# Altium PCB MIET_464512_002_C2.PcbDoc
Units mm, origin at the board's own origin, x right, y up, seen from the top; angles counter-clockwise.
Board outline 138 x 64 mm, 2 copper layers (Top Layer, Bottom Layer), stack 1.535 mm thick; 44 components, 61 nets, 236 pads, 62 vias.
Unrouted connection lines stored in the file: 1.
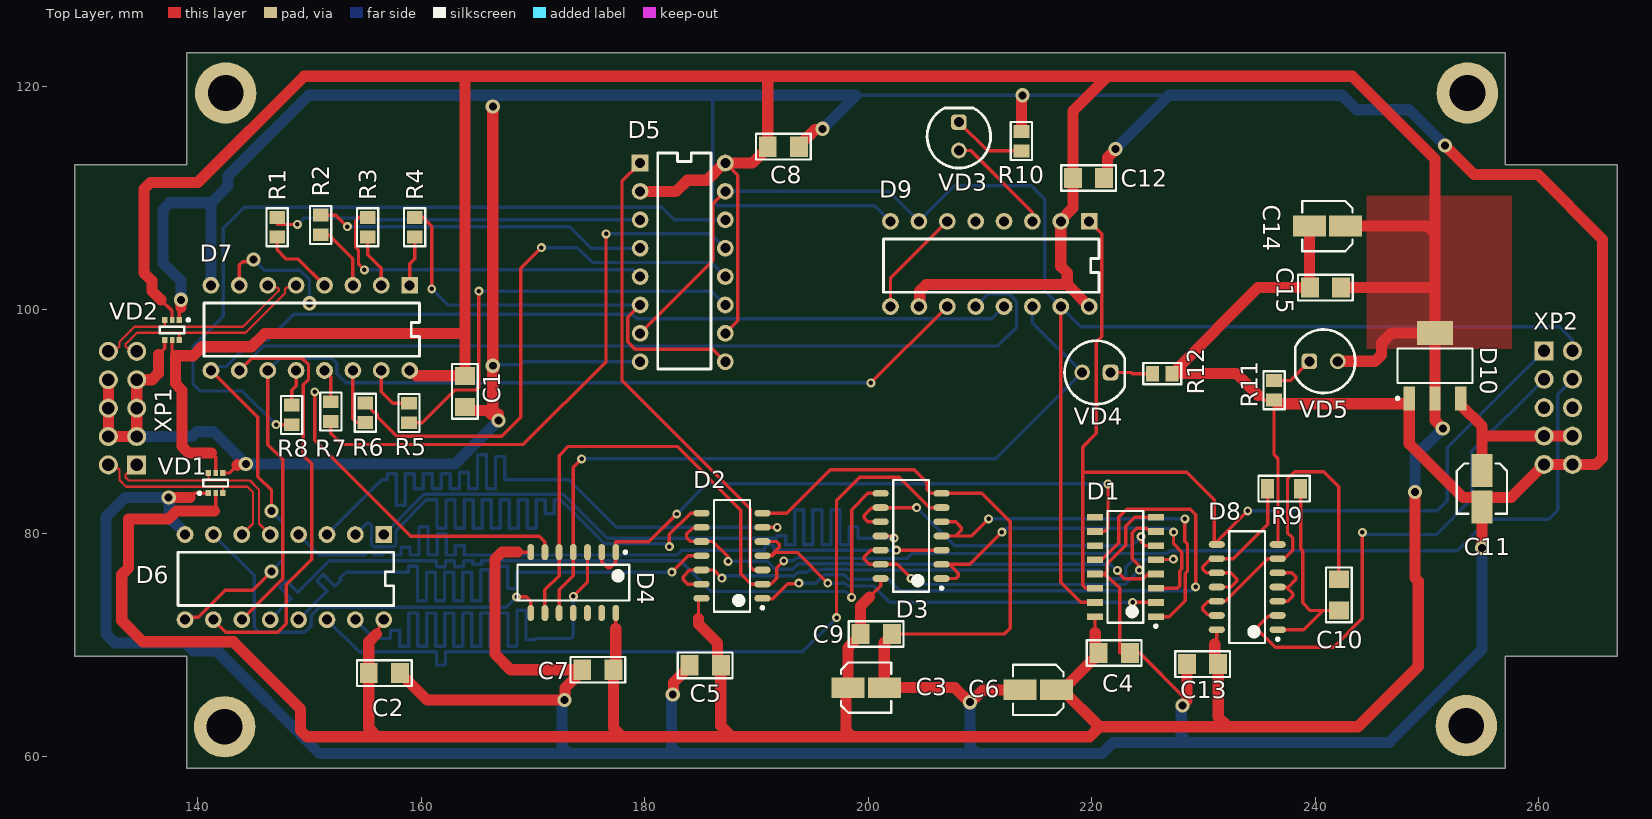
[diagram p0: Top Layer view]
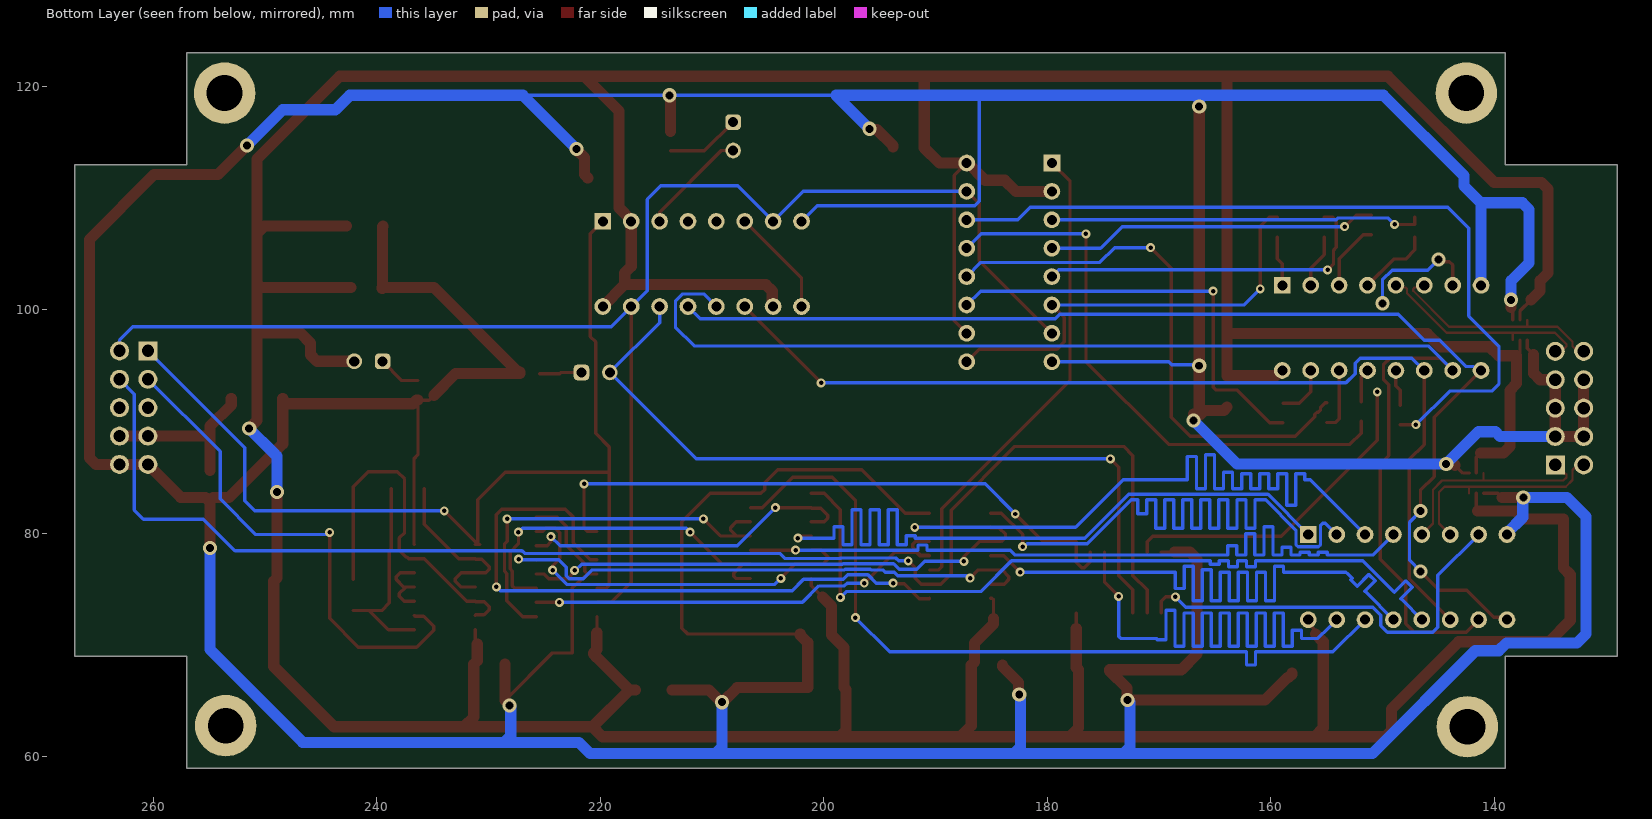
[diagram p1: Bottom Layer view, seen from below]
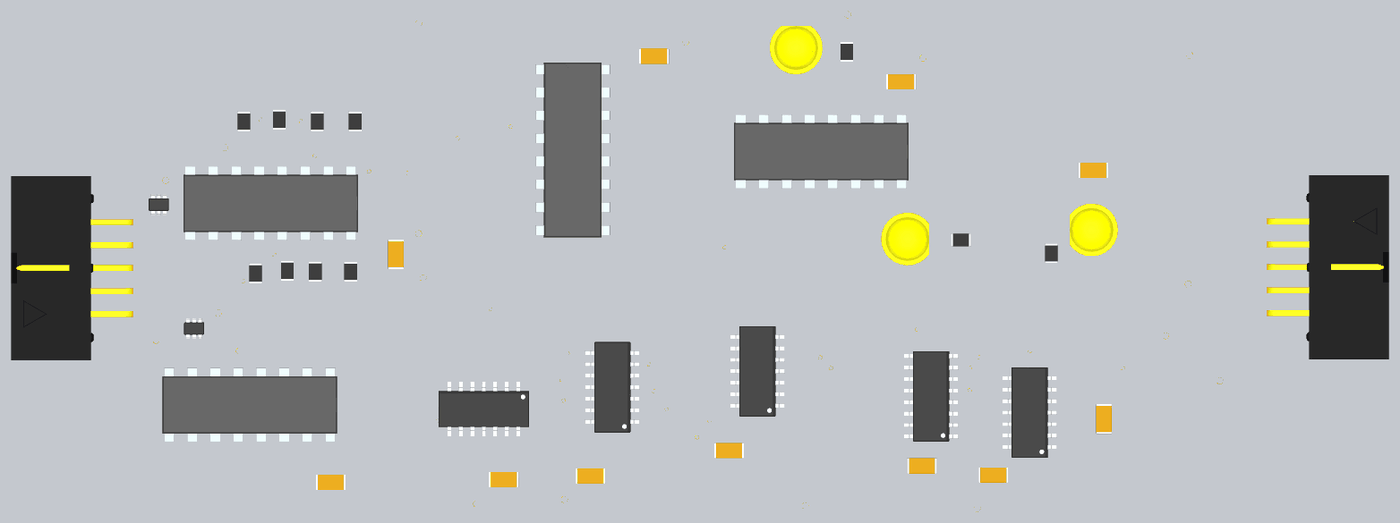
[diagram p2: 3D render of the assembled board from above, using the file's embedded part models]

## Layer stack, top to bottom
Top Solder: solder mask 0.0102, Solder Resist, Dk 3.5
Top Layer: signal copper 0.018
Dielectric 1: core 1.499, Core-043, Dk 4.3
Bottom Layer: signal copper 0.018
Bottom Solder: solder mask 0.0102, Solder Resist, Dk 3.5

## Board outline
139,59 139,69 129,69 129,113 139,113 139,123 257,123 257,113 267,113 267,69 257,69 257,59

## Design rules (kind name [scope] priority, off if disabled: settings)
Clearance [All] p1: gap=0.2 ignorepadtopadclearanceinfootprint=FALSE
DiffPairsRouting [All] p1: maxlimit=0.77 minlimit=0.2 mostfreqgap=0.35 toplayer_minwidth=0.2 toplayer_maxwidth=0.5 toplayer_prefwidth=0.38 bottomlayer_minwidth=0.2 bottomlayer_maxwidth=0.5 bottomlayer_prefwidth=0.38 maxuncoupledlength=12.7
HoleSize [All] p1: absolutevalues=TRUE maxlimit=4.5 minlimit=0.4 maxpercent=80.000 minpercent=20.000
HoleToHoleClearance [All] p1: gap=0.8 allowstackedmicrovias=TRUE
MatchedLengths [InNetClass('ABC[0..7]')] p1: tolerance=1 checknetsindiffpair=FALSE checkdiffpairvsdiffpair=TRUE checkxsignals=TRUE checkothers=TRUE
PolygonConnect [All] p1: connectstyle=Relief reliefconductorwidth=0.254 reliefentries=4 polygonreliefangle="90 Angle" airgapwidth=0.254
RoutingVias [All] p1: holewidth=0.4 width=0.8 viastyle="Through Hole" minholewidth=0.3 minwidth=0.6 maxholewidth=1 maxwidth=1.5
SolderMaskExpansion [All] p1: expansion=0.102 istentingtop=FALSE
Width [All] p1: maxlimit=1 minlimit=0.2 preferedwidth=0.3
27 further rules are at their usual default settings.

## Classes and differential pairs
net class S[0..2]: S0 S1 S2
net class IND[0..7]: IND0 IND1 IND2 IND3 IND4 IND5 IND6 IND7
net class ABC[0..7]: ABC0 ABC1 ABC2 ABC3 ABC4 ABC5 ABC6 ABC7
component class MIET_464512_002_SH2: C10 C11 C12 C13 C14 C15 D8 D9 D10 gg R9 R10 R11 R12 VD3 VD4 VD5
component class MIET_464512_002_C2_SH1: C1 C2 C3 C4 C5 C6 C7 C8 C9 D1 D2 D3 D4 D5 D6 D7 R1 R2 R3 R4 R5 R6 R7 R8 VD1 VD2 XP1
differential pair Out2: +Out2_P -Out2_N
differential pair Out1: +Out1_P -Out1_N

## Components (designator, comment, footprint, x,y, rotation, side; value= is the part's Value field where it differs from the comment)
C1 "1206" K10-79_3.2_1.6(1206) 163.9,92.7 r90 top value="1200 п"
C2 "1206" K10-79_3.2_1.6(1206) 156.7,67.5 r180 top value="1200 п"
C3 "CA010M0010REB-0405" CAPAE4443X63M 199.8,66.2 r0 top
C4 "1206" K10-79_3.2_1.6(1206) 222,69.3 r180 top value="0,1 мк"
C5 "1206" K10-79_3.2_1.6(1206) 185.4,68.2 r0 top value="0,1 мк"
C6 "CA010M0010REB-0405" CAPAE4443X63M 215.2,66 r180 top
C7 "1206" K10-79_3.2_1.6(1206) 175.8,67.8 r180 top value="0,1 мк"
C8 "1206" K10-79_3.2_1.6(1206) 192.4,114.6 r0 top value="0,1 мк"
C9 "1206" K10-79_3.2_1.6(1206) 200.7,71 r0 top value="0,1 мк"
C10 "1206" K10-79_3.2_1.6(1206) 242.1,74.5 r90 top value="1200 п"
C11 "CA010M0010REB-0405" CAPAE4443X63M 254.9,84 r270 top
C12 "1206" K10-79_3.2_1.6(1206) 219.7,111.8 r180 top value="0,1 мк"
C13 "1206" K10-79_3.2_1.6(1206) 229.9,68.3 r0 top value="0,1 мк"
C14 "CA010M0010REB-0405" CAPAE4443X63M 241.075,107.5 r180 top
C15 "1206" K10-79_3.2_1.6(1206) 240.9,102 r0 top value="0,1 мк"
D1 "SOIC-16" SO16-N 223,77 r180 top
D2 "74AC00SC" SO14-N 187.8,78 r180 top
D3 "74AC00SC" SO14-N 203.825,79.77 r180 top
D4 "74AC00SC" SO14-N 173.6,75.6 r270 top
D5 "MC14520BCP \"Motorola\"" DIP16 179.58,113.14 r0 top
D6 "DIP-16" DIP16 156.64,79.9 r270 top
D7 "DIP-16" DIP16 158.96,102.2 r270 top
D8 "74AC00SC" SO14-N 233.9,75.2 r180 top
D9 "MC14520BCP \"Motorola\"" DIP16 219.76,107.92 r270 top
D10 "LM1117IMP-5.0" SOT-223 250.7,95 r90 top
R1 "0805" RES_0805_2012_N 147.1,107.4 r270 top value=270
R2 "0805" RES_0805_2012_N 151,107.6 r270 top value=270
R3 "0805" RES_0805_2012_N 155.2,107.4 r270 top value=270
R4 "0805" RES_0805_2012_N 159.4,107.4 r270 top value=270
R5 "0805" RES_0805_2012_N 158.9,90.775 r90 top value=270
R6 "0805" RES_0805_2012_N 155,90.8 r270 top value=270
R7 "0805" RES_0805_2012_N 151.9,90.9 r90 top value=270
R8 "0805" RES_0805_2012_N 148.4,90.6 r90 top value=270
R9 "Р1-12-0,25 100 Ом 5%-M-\"A\" АЛЯР.434110.005 ТУ" RES_1206_3216_N 237.2,84 r180 top value=100
R10 "0805" RES_0805_2012_N 213.7,115.1 r270 top value=270
R11 "0805" RES_0805_2012_N 236.3,92.8 r90 top value=270
R12 "0805" RES_0805_2012_N 226.3,94.3 r180 top value=270
VD1 "SOT-363" SOT363_NXP 141.6,84.5 r90 top
VD2 "SOT-363" SOT363_NXP 137.7,98.2 r270 top
VD3 "521-9466" 521-9466 208.1,115.53 r90 top
VD4 "521-9466" 521-9466 220.4,94.4 r0 top
VD5 "521-9466" 521-9466 240.73,95.4 r180 top
XP1 "TE_1-1634689-0" BH-10R 133.27,91.21 r0 top
XP2 "TE_1-1634689-0" BH-10R 261.73,91.25 r180 top

## Footprints (in the part's own frame and the unit in brackets; to place one, negate y for a bottom-side part, rotate by r counter-clockwise, add the part's x,y. Pads: shape width x height; smd on the part's side, far side on the other; paste and mask are expansions set on the pad)
521-9466 [mm]
  round 1.4 hole 0.9: A(-1.27,0)
  rrect50% 1.4x1.4 hole 0.9: C(1.27,0)
  silkscreen extent -2.84,-2.84 2.54,2.84, body extent -2.92,-2.92 2.41,2.92, height 9.51
BH-10R [mm] "Разъем угловой 2х5х2,54 типа ВН"
  rect 1.7x1.7 hole 1.1: 1(1.27,-5.08)
  round 1.7 hole 1.1: 2(-1.27,-5.08) 3(1.27,-2.54) 4(-1.27,-2.54) 5(1.27,0) 6(-1.27,0) 7(1.27,2.54) 8(-1.27,2.54) 9(1.27,5.08) 10(-1.27,5.08)
  body extent -11.85,-10.2 1.65,10.15, height 9.13
CAPAE4443X63M [mm] "Aluminum Electrolytic Capacitor, Body 4,30x4,30x6,30mm, IPC Low Density"
  rect 2.95x1.85 smd: 1(-1.625,0) 2(1.625,0)
  silkscreen extent -2.25,-2.25 2.25,2.25, body extent -2.9,-2.9 2.9,2.9, height 6.3
DIP16 [mm]
  rect 1.5x1.5 hole 0.9: 1(0,0)
  round 1.5 hole 0.9: 2(0,-2.54) 3(0,-5.08) 4(0,-7.62) 5(0,-10.16) 6(0,-12.7) 7(0,-15.24) 8(0,-17.78) 9(7.62,-17.78) 10(7.62,-15.24) 11(7.62,-12.7) 12(7.62,-10.16) 13(7.62,-7.62) 14(7.62,-5.08) 15(7.62,-2.54) 16(7.62,0)
  silkscreen extent 1.58,-18.42 6.35,0.89, body extent -0.25,-18.54 7.95,0.76, height 5.08
K10-79_3.2_1.6(1206) [mm]
  rect 1.6x1.8 smd: 1(-1.4,0) 2(1.4,0)
  silkscreen extent -2.45,-1.15 2.45,1.15, body extent -1.65,-0.85 1.65,0.85, height 1.6
RES_0805_2012_N [mm] "Rezistor 0805"
  rect 1.15x1.4 smd: 1(-0.875,0) 2(0.875,0)
  silkscreen extent -1.7,-0.95 1.7,0.95, body extent -1.1,-0.7 1.1,0.7, height 0.6
RES_1206_3216_N [mm] "Chip Resistor, 2-Leads, Body 3,20x1,60mm, IPC Medium Density"
  rect 1.15x1.75 smd: 1(-1.475,0) 2(1.475,0)
  silkscreen extent -2.3,-1.15 2.3,1.15, body extent -1.7,-0.87 1.7,0.87, height 0.8
SO14-N [mm]
  oval 1.45x0.6 smd: 1(-2.725,3.81) 2(-2.725,2.54) 3(-2.725,1.27) 4(-2.725,0) 5(-2.725,-1.27) 6(-2.725,-2.54) 7(-2.725,-3.81) 8(2.725,-3.81) 9(2.725,-2.54) 10(2.725,-1.27) 11(2.725,0) 12(2.725,1.27) 13(2.725,2.54) 14(2.725,3.81)
  silkscreen extent -2.85,-5 1.6,5, body extent -3,-5 3,5, height 1.45
SO16-N [mm] "SOIC, 16-Leads, Body 9,90x3,90mm, Pitch 1,27mm, IPC Medium Density"
  rect 1.45x0.6 smd: 1(-2.725,4.445) 2(-2.725,3.175) 3(-2.725,1.905) 4(-2.725,0.635) 5(-2.725,-0.635) 6(-2.725,-1.905) 7(-2.725,-3.175) 8(-2.725,-4.445) 9(2.725,-4.445) 10(2.725,-3.175) 11(2.725,-1.905) 12(2.725,-0.635) 13(2.725,0.635) 14(2.725,1.905) 15(2.725,3.175) 16(2.725,4.445)
  silkscreen extent -2.85,-5 1.6,5.42, body extent -3,-5 3,5, height 1.45
SOT363_NXP [mm]
  rect 0.55x0.5 smd: 1(-0.9,0.65) 3(-0.9,-0.65) 4(0.9,-0.65) 6(0.9,0.65)
  rect 0.55x0.4 smd: 2(-0.9,0) 5(0.9,0)
  silkscreen extent -1.02,-1.1 0.3,1.57, body extent -1.15,-1.1 1.15,1.1, height 1.1
SOT-223 [mm] "SOT223, 4-Leads, Body 6,50x7,00mm (avg), Pitch 2,30mm, IPC Medium Density"
  rect 2.15x1 smd: 1(-2.925,2.3) 2(-2.925,0) 3(-2.925,-2.3)
  rect 2.15x3.25 smd: 4(2.925,0)
  silkscreen extent -3.05,-3.35 1.55,3.47, body extent -1.85,-3.35 1.85,3.35, height 1.8

## Part data
C1 C2 C10: library part К10-79_1206_МП0, "Чип конденсатор 1206 МП0 ряд Е24", Manufacturer="ООО \"Кулон\"", Tolerance=±5%, Value_KD="1200 пФ", Voltage=50, BOM="Конденсатор К10-79-50-B-1200 пФ±5%-МП0 АЖЯР.673511.004 ТУ", Datum=19_12_2018, HelpURL=\\papa\Info\Altium_Library\Даташиты_и_ТУ\Конденсаторы_отечественные\К10-79_АЖЯР_673511_004ТУ.pdf, Hight=1.6, LibraryEngeneer=Желобаев, LiveStatus=производится, Name="Конденсатор К10-79", Packing=катушка, Permit MPSU=разрешен, Reliability=0.000005, Size=1206, TKE=МП0, TU="АЖЯР.673511.004 ТУ", Type=K10-79, Version=00, Weight=0.15
C3 C6 C11 C14: "Конденсатор алюминиевый электролитический"
C4 C5 C7 C8 C9 C12 C13 C15: library part К10-79_1206_Н90, "Чип конденсатор 1206 Н90 ряд Е6", Manufacturer="ООО \"Кулон\"", Tolerance=+80%-20%, Value_KD="0,1 мкФ", Voltage=50, BOM="Конденсатор К10-79-50-B-0,1 мкФ+80%-20%-Н90 АЖЯР.673511.004 ТУ", Datum=19_12_2018, HelpURL=\\papa\Info\Altium_Library\Даташиты_и_ТУ\Конденсаторы_отечественные\К10-79_АЖЯР_673511_004ТУ.pdf, Hight=1.6, LibraryEngeneer=Желобаев, LiveStatus=производится, Name="Конденсатор К10-79", Packing=катушка, Permit MPSU=разрешен, Reliability=0.000005, Size=1206, TKE=Н90, TU="АЖЯР.673511.004 ТУ", Type=K10-79, Version=00, Weight=0.15
D1: library part HCF4017BM1, "Декадный счетчик c 10 декодированными выходами", Manufacturer=STMicroelectronics, Power_Voltage="-0.5 -22 V", BOM="HCF4017BM1 \"STMicroelectronics\"", Case=SOIC-16, Created_by=Желобаев, Issue_date=05.04.2019, Name=HCF4017BM1, Name2="Микросхема HCF4017BM1", Version=0
D2 D3 D4 D8: "4 элемента 2И-НЕ TTL SOIC-14", Case=SOIC-14, Manufacturer="ON Semiconductor", Power_Voltage="4.5 - 5.5 V", BOM="74AC00SC \"ON Semiconductor\"", Created_by=Желобаев, Issue_date=10.04.2019, Name=74AC00SC, Name2="Микросхема 74AC00SC", Version=0
D5 D9: library part MC14520BCP, "Два двоичных счетчика", Case=DIP-16, Manufacturer=Motorola, BOM="MC14520BCP \"Motorola\"", Created_by=Желобаев, Issue_date=6.01.2019, Name=MC14520BCP, Name2="Микросхема MC14520BCP", Version=0
D6 D7: library part 74HC151N, "мультиплексор 8 канальный CMOS", Manufacturer="NXP Semiconductors", Power_Voltage="2.0 -6.0 V", BOM="74HC151N \"NXP Semiconductors\"", Case=DIP-16, Created_by=Желобаев, Issue_date=05.04.2019, Name=74HC151N, Name2="Микросхема 74HC151N", Version=0
R1 R2 R3 R4 R5 R6 R7 R8 R10 R11 R12: library part Р1-12-0,125-5%, "Резистор от 0,75 Ом до 2 МОм", Manufacturer="ОАО \"НПО \"Эркон\"", Tolerance=5%, Value_KD="270 Ом", Voltage=150, BOM="Р1-12-0,125 270 Ом 5%-M-\"A\" АЛЯР.434110.005 ТУ", Case=0805, Created_by=Желобаев, Issue_date=05_12_2018, Name=Р1-12-0,125, Name2="Резистор Р1-12-0,125", Size=0805, TKR=M, TU="АЛЯР.434110.005 ТУ", Type="Р1-12-0,125±5%-М-\"А\"", Version=00, Weight=0,01
R9: library part Р1-12-0,25-5%, "Резистор от 0,75 Ом до 2,2 МОм", Case=1206, Manufacturer="ОАО \"НПО \"Эркон\"", Tolerance=5%, Value_KD="100 Ом", Voltage=150, BOM="Р1-12-0,25 100 Ом 5%-M-\"A\" АЛЯР.434110.005 ТУ", Created_by=Желобаев, Issue_date=10.04.2019, Name=Р1-12-0,25, Name2="Резистор Р1-12-0,25", Size=1206, TKR=M, TU="АЛЯР.434110.005 ТУ", Type="Р1-12-0,25±5%-М-\"А\"", Version=00, Weight=0,015
VD1 VD2: library part BAV99S, "Высокоскоростные, переключающие диоды", Manufacturer=Nexperia, Voltage=100, BOM="BAV99S \"Nexperia\"", Case=SOT-363, Created_by=Желобаев, Issue_date=07.01.2019, Name=BAV99S, Name2="Диод BAV99S", Version=0
VD3 VD4 VD5: "Светодиод желтый 5 мм", Manufacturer="\"Dialight\"", BOM=#NAME?
XP1 XP2: "Вилка типа BH-10R угловая правая двухрядная 2х5х2.54", Case=BH-10R, Manufacturer="TE Connectivity", BOM="TE_1-1634689-0 \"TE Connectivity\"", Created_by=Желобаев, Issue_date=13.05.2019, Name=TE_1-1634689-0, Name2="Вилка угловая TE_1-1634689-0", Version=0

## Free pads (board coordinates)
  round 5.5 hole 3.2: M6(253.5,62.8) M7(253.6,119.4) M8(142.4,62.7) M9(142.5,119.4)

## Via types
v1: diameter 0.8, hole 0.4, Top Layer to Bottom Layer, 41 vias
v2: diameter 1.27, hole 0.711, Top Layer to Bottom Layer, 21 vias

## Nets (pads, with @x,y where several pads share a name; then routed paths per layer and width w, separated by ;. In a path a pad name is that pad's centre, name@x,y a point inside that pad or via, vN(x,y) a via of type N, cw(c..) or ccw(c..) an arc to the next point about the centre after c; other vN are vias at no path point)
+5: 
+5V: C1.2 C2.2 C3.1 C4.2 C5.2 C6.1 C7.1 C8.1 C9.1 C12.2 C13.2 C14.1 C15.2 D1.16 D2.14 D3.14 D4.14 D5.2 D5.10 D5.16 D6.16 D7.16 D8.14 D9.2 D9.10 D9.16 D10.2 D10.4 VD1.2 VD1.5 VD2.2 VD2.5 VD5.A | length 574.7
  Top Layer w0.3: 136.7,100.9 137.7,99.9 VD2.2 ; VD2.5 137.7,96.2 138,95.9 ; 141.2,87.2 141.6,86.8 VD1.5 ; 141.5,82 141.6,82.1 VD1.2 ; 156,71 156,71.315 156.64,71.955 D6.16 ; 177.4,71.5 177.41,71.51 D4.14 ; 184.8,72.4 184.8,74.051 184.939,74.19 D2.14 ; D5.10 188.316,99.016 188.316,112.024 D5.16 ; 200.1,74.3 201.1,75.3 D3.14 ; 220.275,71.125 D1.16 ; 231,70.1 231.175,70.275 D8.14
  Top Layer w1: 136.7,100.9 135.9,101.7 135.9,102.6 135.2,103.3 135.2,110.814 135.786,111.4 140,111.4 149.5,120.9 164.2,120.9 ; 141.2,87.2 139.186,87.2 138.6,87.786 138.6,92.8 138,93.4 138,95.9 139.6,95.9 140.4,96.7 144.8,96.7 146,97.9 163.9,97.9 ; 141.5,82 138.088,82 137.388,81.3 133.8,81.3 133.8,76.9 133.2,76.3 133.2,72.201 135.101,70.3 143.2,70.3 149.2,64.3 149.2,62.386 149.786,61.8 156.086,61.8 ; 156,71 155.3,70.3 C2.2 155.3,62.586 156.086,61.8 ; D7.16 159.095,94.58 159.575,94.1 C1.2 163.9,97.9 ; 177.4,71.5 177.4,68 C7.1 177.2,62.586 177.986,61.8 ; D5.2 182.8,110.6 183.8,111.6 185.558,111.6 187.098,113.14 D5.16 189.64,113.14 191,114.5 191,120.9 ; 184.8,72.4 184.8,71.9 186.5,70.2 186.5,68.5 C5.2 186.8,62.786 187.786,61.8 ; 200.1,74.3 199.3,73.5 C9.1 199.3,70.9 198.175,69.775 C3.1 198,66.025 198,62.386 198.586,61.8 ; D9.10 204.6,100.38 204.6,101.674 205.186,102.26 217.8,102.26 ; C6.1 C6.1@217.375,66 ; D9.16 217.8,102.26 ; 220.275,71.125 220.3,71.1 220.3,69.6 C4.2 220.6,69.2 220.3,68.9 220.275,68.9 C6.1@217.375,66 ; 231,70.1 231,68.6 C13.2 231.3,63.586 232.186,62.7 ; VD5.A 245.314,95.4 245.9,95.986 245.9,97.014 246.811,97.925 D10.4 ; C15.2 250.33,102 250.7,102.37 ; C14.1 250.014,107.5 250.7,106.814 ; v2(248.9,83.7) 248.9,76.013 249.2,75.713 249.2,68.1 243.8,62.7 232.186,62.7 ; v2(251.4,89.4) 250.7,90.1 D10.2 D10.4 ; 156.086,61.8 177.986,61.8 ; 163.9,97.9 163.9,120.6 164.2,120.9 ; 164.2,120.9 191,120.9 ; 177.986,61.8 187.786,61.8 ; 187.786,61.8 198.586,61.8 ; 191,120.9 221.4,120.9 ; 198.586,61.8 219.775,61.8 220.675,62.7 ; C6.1@217.375,66 220.675,62.7 ; 217.8,102.26 217.8,103.3 217.22,103.88 D9.2 217.22,108.055 218.3,109.135 C12.2 218.3,117.8 221.4,120.9 ; 220.675,62.7 232.186,62.7 ; 221.4,120.9 243.3,120.9 250.7,113.5 250.7,106.814 ; D10.4 250.7,102.37 ; 250.7,102.37 250.7,106.814
  Bottom Layer w1: v2(248.9,83.7) 248.9,86.9 249.2,87.2 v2(251.4,89.4)
ABC0: D3.3 D6.4 | length 72.3
  Top Layer w0.3: v1(202.514,78.5) D3.3
  Bottom Layer w0.3: D6.4 150.855,78.065 151.1,78.065 154.8,78.065 154.95,78.065 154.95,78.3 155.758,78.3 155.758,78.065 156.566,78.065 156.566,78.3 157.374,78.3 157.374,78.065 158.182,78.065 158.182,78.771 158.99,78.771 158.99,78.065 159.798,78.065 159.798,80.605 160.606,80.605 160.606,78.065 161.414,78.065 161.414,79.96 162.222,79.96 162.222,78.065 163.03,78.065 163.03,78.894 163.838,78.894 163.838,78.065 165.6,78.065 179.6,78.065 182.877,78.065 183.312,78.5 190.6,78.5 190.75,78.5 190.75,78.96 191.558,78.96 191.558,78.5 199.8,78.5 v1(202.514,78.5)
ABC1: D2.6 D6.3 | length 72.3
  Top Layer w0.3: D2.6 v1(191.846,80.54)
  Bottom Layer w0.3: D6.3 156.46,84.8 156.8,84.8 156.95,84.8 156.95,85.35 157.758,85.35 157.758,82.533 158.566,82.533 158.566,85.35 159.374,85.35 159.374,83.997 160.182,83.997 160.182,85.35 160.99,85.35 160.99,84 161.798,84 161.798,85.35 162.606,85.35 162.606,84 163.414,84 163.414,85.458 164.222,85.458 164.222,84 165.03,84 165.03,87.028 165.838,87.028 165.838,84 166.646,84 166.646,86.881 167.454,86.881 167.454,84.8 170.5,84.8 173.2,84.8 177.46,80.54 v1(191.846,80.54)
ABC2: D2.8 D6.2 | length 72.3
  Top Layer w0.3: v1(182.194,78.816) 182.194,79.905 184.099,81.81 D2.8
  Bottom Layer w0.3: D6.2 155.1,80.9 155.364,80.9 155.54,80.724 155.54,79.005 155.745,78.8 157.535,78.8 157.74,79.005 157.74,80.293 160.447,83 161.405,83 161.405,80.46 162.213,80.46 162.213,83 163.021,83 163.021,80.46 163.829,80.46 163.829,83 164.637,83 164.637,80.46 165.445,80.46 165.445,83 166.253,83 166.253,80.46 167.061,80.46 167.061,83 167.869,83 167.869,80.46 168.677,80.46 168.677,83 169.485,83 169.485,80.46 170.293,80.46 170.293,83 171.101,83 171.101,81.773 171.909,81.773 171.909,83 172.493,83 176.415,79.078 181.797,79.078 182.059,78.816 v1(182.194,78.816)
ABC3: D3.11 D6.1 | length 72.4
  Top Layer w0.3: D3.11 202.119,79.77 v1(202.311,79.578)
  Bottom Layer w0.3: D6.1 160.24,83.5 172.7,83.5 176.622,79.578 191.658,79.578 191.808,79.578 191.808,79.79 192.616,79.79 192.616,79 193.424,79 193.424,82.118 194.232,82.118 194.232,79 195.04,79 195.04,82.118 195.848,82.118 195.848,79 196.656,79 196.656,82.118 197.464,82.118 197.464,79 198.272,79 198.272,80.584 199.08,80.584 199.08,79.578 199.3,79.578 v1(202.311,79.578)
ABC4: D4.3 D6.15 | length 72.3
  Top Layer w0.3: v1(173.609,74.371) 174.87,75.632 D4.3
  Bottom Layer w0.3: D6.15 154.807,71.573 155.78,70.6 157.1,70.6 157.25,70.6 157.25,71.334 158.058,71.334 158.058,69.9 158.866,69.9 158.866,72.88 159.674,72.88 159.674,69.9 160.482,69.9 160.482,72.88 161.29,72.88 161.29,69.9 162.098,69.9 162.098,72.88 162.906,72.88 162.906,69.9 163.714,69.9 163.714,72.88 164.522,72.88 164.522,69.9 165.33,69.9 165.33,72.88 166.138,72.88 166.138,69.9 166.946,69.9 166.946,72.88 167.754,72.88 167.754,69.9 168.562,69.9 168.562,73.14 169.37,73.14 169.37,70.492 170.178,70.492 170.178,70.6 170.8,70.6 173.433,70.6 173.609,70.776 v1(173.609,74.371)
ABC5: D3.6 D6.14 | length 72.3
  Top Layer w0.3: v1(197.155,72.466) 197.155,82.956 199.238,85.039 202.757,85.039 205.486,82.31 D3.6
  Bottom Layer w0.3: D6.14 154.44,69.4 160.4,69.4 161.358,69.4 161.358,68.231 162.166,68.231 162.166,69.4 164.8,69.4 194.089,69.4 v1(197.155,72.466)
ABC6: D2.11 D6.13 | length 72.3
  Top Layer w0.3: v1(182.426,76.53) 183.896,78 D2.11
  Bottom Layer w0.3: D6.13 151.47,74.73 151.576,74.836 150.66,75.753 151.231,76.324 152.268,75.287 152.839,75.858 152.719,75.979 153.158,76.418 153.27,76.53 158.7,76.53 158.85,76.53 158.85,77.065 159.658,77.065 159.658,73.99 160.466,73.99 160.466,76.537 161.274,76.537 161.274,73.99 162.082,73.99 162.082,76.53 162.89,76.53 162.89,73.99 163.698,73.99 163.698,76.53 164.506,76.53 164.506,73.99 165.314,73.99 165.314,76.754 166.122,76.754 166.122,73.99 166.93,73.99 166.93,77.065 167.738,77.065 167.738,75.07 168.546,75.07 168.546,76.53 169.5,76.53 v1(182.426,76.53)
ABC7: D3.8 D6.12 | length 72.3
  Top Layer w0.3: v1(198.501,74.27) 198.501,82.132 199.949,83.58 D3.8
  Bottom Layer w0.3: D6.12 148.25,74.05 148.356,74.156 147.338,75.174 147.909,75.746 148.927,74.727 150.2,76 151.765,77.565 160.4,77.565 160.55,77.565 161.358,77.565 161.358,77.03 162.166,77.03 162.166,77.565 162.974,77.565 162.974,77.03 163.782,77.03 163.782,77.565 164.59,77.565 164.59,77.254 165.398,77.254 165.398,77.565 166.3,77.565 183.192,77.565 185.956,74.8 197.971,74.8 v1(198.501,74.27)
GND: C1.1 C2.1 C3.2 C4.1 C5.1 C6.2 C7.2 C8.2 C9.2 C11.2 C12.1 C13.1 C14.2 C15.1 D1.8 D1.13 D2.7 D3.7 D4.7 D5.8 D6.8 D7.8 D8.7 D9.8 D10.1 R10.1 R11.1 R12.1 VD1.1 VD1.4 VD2.1 VD2.4 XP1.3 XP1.4 XP1.5 XP1.6 XP1.7 XP1.8 XP2.9 XP2.10 | length 727.1
  Top Layer w0.3: 136.5,96 137.05,96.55 VD2.4 ; VD2.1 138.35,100.05 138.5,100.2 ; 139.3,83.2 139.7,83.6 VD1.1 ; VD1.4 142.8,85.4 143.5,86.1 ; 168.6,78.325 D4.7 ; D2.7 192.684,81.81 196.574,85.7 204.114,85.7 205.283,84.531 205.283,83.922 205.624,83.58 D3.7 210.16,83.58 212.7,81.04 212.7,71.526 212.173,71 C9.2 ; D1.13 221.12,76.365 ; D1.8 223.818,81.445 223.023,80.65 223.023,78.928 221.361,77.266 221.361,76.606 221.12,76.365 ; v2@228.5,65.073 224.273,69.3 C4.1 222.479,69.3 222.479,70.83 222.479,75.133 221.12,76.365 ; 234.871,92.359 235.306,91.925 R11.1 236.3,87.042 236.652,86.69 236.652,79.01 D8.7
  Top Layer w1: XP1.8 XP1.6 XP1.4 XP1.3 XP1.5 XP1.7 135.914,93.75 136.5,94.336 136.5,96 ; v2(137.4,83.2) 139.3,83.2 ; 138.5,100.2 v2(138.5,100.9) ; 143.5,86.1 143.548,86.148 ; C2.1 158.1,67.4 158.4,67.1 158.5,67.1 160.5,65.1 v2(172.8,65.1) 172.852,65.152 172.852,66.152 174.4,67.7 C7.2 168,67.8 166.6,69.2 166.6,77.7 167.225,78.325 168.6,78.325 ; C1.1 164.2,91 164.711,91 165.927,91 166.327,90.6 ; 166.4,90.673 166.4,91 v2(166.4,95) v2(166.4,118.2) ; v2@166.9,90.173 v2@166.9,90.673 ; v2(182.5,65.6) 182.552,65.652 182.552,66.652 184,68.1 C5.1 ; C8.2 193.8,114.7 195.248,116.148 ; C9.2 202.1,70.9 201.425,70.225 C3.2 207.727,66.2 209.027,64.9 v2(209.1,64.9) 209.173,64.9 210.273,66 C6.2 ; R10.1 213.7,119.027 213.8,119.127 v2(213.8,119.2) ; C12.1 221.4,112.1 221.4,113.627 222.1,114.327 v2(222.1,114.4) ; v2@228.5,65.073 C13.1 ; 234.871,92.359 232.931,94.3 R12.1 227.175,94.425 227.25,94.5 227.375,94.5 234.875,102 239.4,102 239.5,101.9 C15.1 239.475,102.025 239.475,107.45 C14.2@239.438,107.488 ; R11.1 236.425,91.925 236.75,91.6 D10.1@248.4,91.6 ; D10.1 D10.1@248.4,91.6 ; v2(251.6,114.7) 254.2,112.1 259.9,112.1 265.7,106.3 265.7,86.756 265.114,86.17 XP2.10 XP2.9 257.514,83.224 255.325,83.224 C11.2@254.9,82.799 ; v2(254.9,78.7) 254.9,82.925 254.625,83.2 253.2,83.2 248.4,88 D10.1@248.4,91.6
  Bottom Layer w0.3: v2(166.4,95) 166.486,95.086 168.861,95.086 169.135,95.36 D5.8 ; 186.1,119.2 186.08,119.18 186.08,109.728 186.487,109.322 200.578,109.322 D9.8 ; 198.9,119.202 213.8,119.202 226.873,119.202
  Bottom Layer w1: XP1.3 139.47,88.67 139.9,89.1 141.4,89.1 v2(144.3,86.2) 163,86.2 v2(166.9,90.1) ; v2(138.5,100.9) 138.5,102.6 136.9,104.2 136.9,108.994 137.486,109.58 141.18,109.58 ; D6.8 138.86,80.035 137.452,81.444 137.452,83.148 v2(137.4,83.2) 133.5,83.2 131.8,81.5 131.8,71 132.6,70.2 138.9,70.2 139.6,69.5 141.7,69.5 150.9,60.3 173.186,60.3 ; D7.8 141.18,109.58 ; v2(166.4,118.2) 166.4,119.2 ; v2(172.8,65.1) 172.6,64.9 172.6,60.886 173.186,60.3 ; v2(182.5,65.6) 182.4,65.5 182.4,60.886 182.986,60.3 ; v2(195.9,116.2) 198.9,119.2 186.08,119.2 167.486,119.2 166.4,119.2 ; v2(209.1,64.9) 209.1,60.886 209.686,60.3 ; v2(222.1,114.4) 226.9,119.2 242.4,119.2 243.7,117.9 248.4,117.9 v2(251.6,114.7) ; v2(228.1,64.6) 228,64.5 228,61.886 228.586,61.3 ; v2(254.9,78.7) 254.9,69.6 246.6,61.3 228.586,61.3 ; 141.18,109.58 142.7,111.1 142.7,112 149.9,119.2 166.4,119.2 ; 173.186,60.3 182.986,60.3 ; 182.986,60.3 209.686,60.3 ; 209.686,60.3 220.9,60.3 221.9,61.3 228.586,61.3
IND0: D5.3 R1.1 | length 33.4
  Top Layer w0.3: R1.1 147.1,107.645 v1(148.92,107.645)
  Bottom Layer w0.3: v1(148.92,107.645) 149.492,108.217 153.993,108.217 154.15,108.06 D5.3
IND1: D5.4 R2.1 | length 29.8
  Top Layer w0.3: R2.1 152.358,108.475 v1(153.391,107.442)
  Bottom Layer w0.3: v1(153.391,107.442) 173.304,107.442 175.226,105.52 D5.4
IND2: D5.5 R3.1 | length 30.8
  Top Layer w0.3: v1(154.915,103.581) 154.381,104.115 154.381,105.357 154.15,105.588 154.15,107.993 154.432,108.275 R3.1
  Bottom Layer w0.3: v1(154.915,103.581) 178.979,103.581 D5.5
IND3: D5.6 D5.9 R4.1 | length 39.9
  Top Layer w0.3: R4.1 160.122,108.275 160.934,107.462 v1(160.934,101.879) ; D5.6 178.46,99.32 178.46,97.13 179.121,96.469 186.091,96.469 D5.9
  Bottom Layer w0.3: v1(160.934,101.879) 162.374,100.44 D5.6
IND4: D5.11 R5.1 | length 38.7
  Top Layer w0.3: R5.1 160.08,89.9 163.017,92.837 164.922,92.837 165.151,93.066 v1(165.151,101.676)
  Bottom Layer w0.3: v1(165.151,101.676) 185.964,101.676 D5.11
IND5: D5.12 R6.1 | length 49.5
  Top Layer w0.3: R6.1 155.125,91.675 155.55,91.25 155.55,91.026 155.726,90.85 155.845,90.85 156.05,90.645 156.05,90.45 157.8,88.7 167.186,88.7 168.885,90.399 168.885,103.709 v1(170.739,105.562)
  Bottom Layer w0.3: v1(170.739,105.562) 173.965,105.562 175.285,104.242 185.938,104.242 D5.12
IND6: D5.13 R7.1 | length 51.8
  Top Layer w0.3: R7.1 151.9,88.976 152.916,87.96 169.113,87.96 176.53,95.377 v1(176.53,106.807)
  Bottom Layer w0.3: v1(176.53,106.807) 185.913,106.807 D5.13
IND7: D5.14 R8.1 | length 71.5
  Top Layer w0.3: v1(147.015,89.725) R8.1
  Bottom Layer w0.3: v1(147.015,89.725) 144.001,92.739 140.208,92.739 139.58,93.367 139.58,96.739 142.291,99.45 142.291,107.29 144.17,109.169 181.508,109.169 182.618,108.06 D5.14
NetC10_1: C10.1 D8.1 R9.1 | length 18.5
  Top Layer w0.3: D8.1 238.938,71.39 240.648,73.1 ; R9.1 238.675,78.62 238.865,78.43 238.865,73.775 239.54,73.1 240.648,73.1 ; C10.1 240.648,73.1
NetC10_2: C10.2 D8.6 D8.12 D8.13 | length 32.1
  Top Layer w0.3: D8.13 231.118,72.717 230.383,72.717 229.924,73.176 229.924,73.424 230.373,73.873 231.118,73.873 D8.12 231.918,73.93 235.728,77.74 237.131,77.74 237.277,77.886 237.365,77.886 237.965,78.485 237.965,79.591 237.5,80.056 237.5,84.871 238.15,85.522 240.767,85.522 242.1,84.188 C10.2
NetC11_1: C11.1 D10.3 XP2.7 XP2.8 | length 15.3
  Top Layer w1: D10.3 253,91.5 254.9,89.6 254.9,88.71 ; C11.1 254.9,88.71 ; XP2.8 254.9,88.71
NetD1_1: D1.1 D3.4 D3.5 | length 36.1
  Top Layer w0.3: D3.4 207.82,79.77 ; D3.5 207.82,81.04 208.331,80.529 208.331,80.281 207.82,79.77 ; v1(210.769,81.305) 209.234,79.77 207.82,79.77 ; D1.1 226.936,72.555 228.346,73.965 228.346,76.411 228.55,76.615 228.55,79.061 228.321,79.291 v1(228.321,81.305)
  Bottom Layer w0.3: v1(210.769,81.305) v1(228.321,81.305)
NetD1_2: D1.2 D2.4 D2.5 | length 40.9
  Top Layer w0.3: D2.5 191.795,79.27 192.041,79.024 192.041,78.776 191.627,78.362 191.322,78.057 190.582,78.057 D2.4 191.396,78 191.692,78.296 193.623,78.296 v1(196.369,75.55) ; v1(223.647,73.825) D1.2
  Bottom Layer w0.3: v1(196.369,75.55) 197.895,75.55 198.145,75.3 200.417,75.3 201.892,73.825 v1(223.647,73.825)
NetD1_3: D1.3 D3.1 D3.2 | length 32.6
  Top Layer w0.3: D3.1 207.82,75.96 208.036,76.176 208.036,76.424 D3.2@207.23,77.23 ; D3.2 D3.2@207.23,77.23 ; v1(211.949,80.112) 209.067,77.23 D3.2@207.23,77.23 ; D1.3 227.647,75.095 227.846,75.294 227.846,76.618 228.05,76.822 228.05,78.31 227.305,79.056 v1(227.305,80.112)
  Bottom Layer w0.3: v1(211.949,80.112) 212.305,80.468 226.948,80.468 v1(227.305,80.112)
NetD1_4: D1.4 D2.9 D2.10 | length 46.3
  Top Layer w0.3: D2.9 185.018,80.483 184.283,80.483 183.724,79.924 183.724,79.676 184.13,79.27 186.084,79.27 187.452,77.902 v1(187.452,77.495) ; v1(222.272,76.683) 222.272,76.596 222.91,75.958 224.6,75.958 225.007,76.365 D1.4
  Bottom Layer w0.3: v1(187.452,77.495) 190.971,77.495 191.67,76.796 193.245,76.796 193.749,77.3 198.266,77.3 198.316,77.25 221.638,77.25 222.205,76.683 v1(222.272,76.683)
NetD1_5: D1.5 D2.12 D2.13 | length 50
  Top Layer w0.3: D2.13 183.84,75.46 183.424,75.876 183.424,76.124 184.03,76.73 186.17,76.73 v1(186.9,76) ; D1.5 225.757,77.668 227.268,77.668 v1(227.3,77.7)
  Bottom Layer w0.3: v1(186.9,76) 187.035,76 187.235,76.2 193.356,76.2 193.693,76.536 194.499,76.536 194.693,76.73 195.755,76.73 195.825,76.8 198.059,76.8 198.129,76.73 220.725,76.73 221.522,75.933 222.755,75.933 223.022,76.2 223.022,76.961 223.716,77.655 227.255,77.655 v1(227.3,77.7)
NetD1_6: D1.6 D3.9 D3.10 | length 30.6
  Top Layer w0.3: D3.10 199.96,81.04 199.624,81.376 199.624,81.624 200.262,82.262 201.052,82.262 D3.9 v1(204.318,82.31) ; v1(224.396,79.718) 224.396,79.248 224.739,78.905 D1.6
  Bottom Layer w0.3: v1(204.318,82.31) 207.723,78.905 223.583,78.905 v1(224.396,79.718)
NetD1_7: D1.7 D3.12 D3.13 | length 34.1
  Top Layer w0.3: D3.12 200.2,78.5 199.624,77.924 199.624,77.676 200.07,77.23 202.576,77.23 v1(203.835,75.971) ; v1(224.257,76.708) 224.257,77.114 223.622,77.749 223.622,80.061 224.029,80.468 224.853,80.468 225.146,80.175 D1.7
  Bottom Layer w0.3: v1(203.835,75.971) 204.374,75.433 222.981,75.433 v1(224.257,76.708)
NetD1_10: D1.10 D4.1 D4.2 | length 55.8
  Top Layer w0.3: D4.2 176.15,78.315 176.15,77.45 176.676,76.924 176.924,76.924 177.41,77.41 177.41,79.248 180.365,79.248 v1(182.855,81.737) ; D1.10 221.145,80.175 221.437,80.467 v1(221.437,84.43)
  Bottom Layer w0.3: v1(182.855,81.737) 185.547,84.43 v1(221.437,84.43)
NetD1_12: D1.12 D2.1 | length 59.3
  Top Layer w0.3: D2.1 190.565,74.15 191.45,74.15 192.789,75.489 193.725,75.489 v1(193.786,75.55) ; D1.12 220.878,77.635 222.413,79.17 222.413,81.468 223.115,82.169 228.803,82.169 229.286,81.686 v1(229.286,75.209)
  Bottom Layer w0.3: v1(193.786,75.55) 195.282,75.55 196.032,76.3 197.852,76.3 198.257,75.895 201.803,75.895 202.819,74.879 228.956,74.879 v1(229.286,75.209)
NetD1_14: D1.14 D8.8 D9.1 XP2.1 | length 91.6
  Top Layer w0.3: D9.1 220.878,106.802 220.878,97.612 220.396,97.13 220.396,88.951 219.177,87.732 219.177,85.471 ; D1.14 219.456,75.095 219.177,75.374 219.177,85.471 ; D8.8@230.75,79.01 D8.8@230.937,79.01 ; D8.8 D8.8@230.937,79.01 ; v1(233.943,82.017) D8.8@230.937,79.01 ; 219.177,85.471 228.498,85.471 230.937,83.033 D8.8@230.937,79.01
  Bottom Layer w0.3: v1(233.943,82.017) 250.901,82.017 251.79,82.906 251.79,87.66 XP2.1
NetD2_2: D2.2 D4.5 D4.9 XP2.4 | length 128.3
  Top Layer w0.3: D4.9 171.06,74.955 172.33,76.225 D4.5 172.33,86.97 173.143,87.782 182.905,87.782 188.595,82.093 188.595,76.403 189.538,75.46 D2.2 191.259,75.46 191.795,75.997 191.795,76.911 v1(192.43,77.546)
  Bottom Layer w0.3: v1(192.43,77.546) 193.288,77.546 193.542,77.8 198.473,77.8 198.523,77.75 203.455,77.75 203.911,78.207 226.746,78.207 226.989,78.45 252.669,78.45 255.499,81.28 260.858,81.28 261.671,82.093 261.671,92.461 XP2.4
NetD2_3: D2.3 D5.1 | length 42.8
  Top Layer w0.3: D5.1 177.952,111.512 177.952,93.701 189.433,82.22 189.433,77.013 189.716,76.73 D2.3
NetD4_4: D4.4 D4.10 D9.14 VD4.A | length 70.4
  Top Layer w0.3: D4.10 172.33,74.955 173.6,76.225 D4.4 173.6,85.919 v1(174.346,86.665)
  Bottom Layer w0.3: v1(174.346,86.665) 211.395,86.665 VD4.A 214.68,98.85 D9.14
NetD4_6: D4.6 D7.7 | length 40.8
  Top Layer w0.3: D7.7 143.72,104.02 144.014,104.314 144.814,104.314 v2(145,104.5) ; v1(150.47,92.659) 150.47,88.341 159.055,79.756 170.552,79.756 171.06,79.248 D4.6
  Bottom Layer w0.3: v2(145,104.5) 145.943,103.557 149.143,103.557 150,102.7 v2(150,100.585)
NetD4_8: D4.8 D6.7 | length 37.8
  Top Layer w0.3: v1(168.529,74.32) 169.409,74.32 169.79,73.939 D4.8
  Bottom Layer w0.3: D6.7 145.059,76.241 145.059,71.603 145.491,71.171 149.555,71.171 150.139,71.755 150.139,72.669 150.85,73.38 167.589,73.38 v1(168.529,74.32)
NetD7_1: D7.1 R4.2 | length 4.5
  Top Layer w0.3: D7.1 158.96,104.14 159.4,104.58 R4.2
NetD7_2: D7.2 R3.2 | length 4.8
  Top Layer w0.3: R3.2 155.2,104.954 156.42,103.734 D7.2
NetD7_3: D7.3 R2.2 | length 6.1
  Top Layer w0.3: R2.2 151.734,106.725 153.88,104.579 D7.3
NetD7_4: D7.4 R1.2 | length 6.7
  Top Layer w0.3: R1.2 147.1,105.376 147.93,104.546 148.994,104.546 D7.4
NetD7_12: D7.12 R8.2 | length 3.3
  Top Layer w0.3: R8.2 148.4,92.812 148.8,93.212 D7.12
NetD7_13: D7.13 R7.2 | length 3
  Top Layer w0.3: D7.13 151.9,94.02 R7.2
NetD7_14: D7.14 R6.2 | length 5.6
  Top Layer w0.3: D7.14 153.88,90.239 154.194,89.925 R6.2
NetD7_15: D7.15 R5.2 | length 4.8
  Top Layer w0.3: D7.15 156.42,92.659 157.429,91.65 R5.2
NetD8_2: D8.2 XP2.3 | length 45.8
  Top Layer w0.3: D8.2 236.568,72.603 235.798,72.603 234.9,71.705 234.9,71.348 236.423,69.825 241.625,69.825 244.2,72.4 v1(244.2,80.1)
  Bottom Layer w0.3: v1(244.2,80.1) 244.2,80.076 244.376,79.9 250.8,79.9 254,83.1 254,87.33 XP2.3
NetD8_3: D8.3 D8.4 D8.5 | length 6.4
  Top Layer w0.3: D8.3 237.53,73.93 237.976,74.376 237.976,74.624 237.455,75.145 ; D8.4 237.565,75.2 238.241,75.876 238.241,76.124 237.895,76.47 D8.5
NetD8_9: D8.9 D8.10 D8.11 R9.2 | length 16.4
  Top Layer w0.3: D8.11 232.445,75.2 232.956,75.711 232.956,75.959 232.445,76.47 230.23,76.47 229.924,76.776 229.924,77.024 230.583,77.683 231.118,77.683 D8.9 232.664,77.74 235.725,80.801 R9.2
NetD9_3: D9.3 VD3.A | length 9.7
  Top Layer w0.3: VD3.A 209.169,114.26 214.68,108.749 D9.3
NetD9_6: D9.6 D9.9 | length 9.7
  Top Layer w0.3: D9.9 201.98,102.84 D9.6
NetR10_2: R10.2 VD3.C | length 6.7
  Top Layer w0.3: VD3.C 210.675,114.225 R10.2
NetR11_2: R11.2 VD5.C | length 3.9
  Top Layer w0.3: R11.2 237.735,93.675 VD5.C
NetR12_2: R12.2 VD4.C | length 3.8
  Top Layer w0.3: VD4.C 223.495,94.4 223.595,94.3 R12.2
Out1_N: D6.6 VD1.3 XP1.2 | length 19.3
  Top Layer w0.2: XP1.2 132.287,85.843 132.816,85.843 132.995,85.664 132.995,84.773 133.593,84.175 142.3,84.175 ; VD1.3 142.25,84.125 142.3,84.175 ; D6.6 144.935,80.895 144.935,83.683 144.443,84.175 142.3,84.175
Out1_P: D6.5 VD1.6 XP1.1 | length 19.1
  Top Layer w0.2: XP1.1 133.79,85.38 133.662,85.38 133.545,85.263 133.545,85.001 133.821,84.725 141,84.725 ; VD1.6 140.95,84.775 141,84.725 ; D6.5 145.485,80.895 145.485,83.911 144.671,84.725 141,84.725
Out2_N: D7.6 VD2.3 XP1.10 | length 19.6
  Top Layer w0.2: XP1.10 132.287,96.577 132.816,96.577 132.995,96.756 132.995,97.149 134.346,98.5 137.1,98.5 ; VD2.3 137.05,98.55 137.1,98.5 ; D7.6 146.467,101.993 147.138,101.993 147.255,101.876 147.255,101.71 144.045,98.5 137.1,98.5
Out2_P: D7.5 VD2.6 XP1.9 | length 19.7
  Top Layer w0.2: XP1.9 134.253,96.577 133.724,96.577 133.545,96.756 133.545,96.921 134.574,97.95 138.4,97.95 ; VD2.6 138.35,97.9 138.4,97.95 ; D7.5 148.593,101.993 147.922,101.993 147.805,101.876 147.805,101.482 144.273,97.95 138.4,97.95
Reset: D1.15 D5.7 D5.15 D9.7 D9.15 XP2.2 | length 134
  Top Layer w0.3: D5.7 186.08,104.4 186.08,109.48 D5.15 ; D9.15 217.22,75.617 219.012,73.825 D1.15
  Bottom Layer w0.3: D5.15 201.84,110.6 D9.7 207.7,111.1 214.579,111.1 215.798,109.88 215.798,101.722 D9.15 219.019,98.501 261.809,98.501 263,97.31 XP2.2
S0: D6.11 D7.11 D9.11 | length 89.9
  Top Layer w0.3: D6.11 147.599,75.939 147.599,86.614 146.26,87.953 D7.11 ; v1(200.232,93.472) D9.11
  Bottom Layer w0.3: D7.11 147.36,95.68 151.994,95.68 152.451,95.223 152.451,94.285 153.264,93.472 v1(200.232,93.472)
S1: D6.10 D7.10 D9.12 | length 116.6
  Top Layer w0.3: D6.10 142.509,71.171 147.142,71.171 147.904,71.933 147.904,75.387 150.19,77.673 150.19,86.233 149.454,86.97 149.454,93.32 149.911,93.777 149.911,95.098 149.327,95.682 144.822,95.682 D7.10
  Bottom Layer w0.3: D7.10 145.914,96.774 211.582,96.774 213.258,98.45 213.258,100.787 212.623,101.422 210.722,101.422 D9.12
S2: D6.9 D7.9 D9.13 | length 104.2
  Top Layer w0.3: D6.9 139.076,72.496 140.06,72.496 142.464,74.9 144.9,74.9 v2(146.6,76.6) ; D7.9 145.364,90.396 145.364,85.09 146.6,83.854 v2(146.6,82)
  Bottom Layer w0.3: D7.9 141.505,94.58 141.853,94.929 142.513,94.929 144.858,97.274 146.274,97.274 148.6,99.6 178.864,99.6 179.264,99.2 211.04,99.2 D9.13 ; v2(146.6,76.6) 147.58,77.58 147.58,81.02 v2(146.6,82)
pads on no net: D1.9 D1.11 D4.11 D4.12 D4.13 D9.4 D9.5 XP2.5 XP2.6

## Polygon pours and split planes (outlines as drawn)
+5V on Top Layer "+5V_L01_P000" (solid, pour order 0): 244.575,96.5 257.575,96.5 257.575,110.2 244.575,110.2

## Silkscreen, mask and mechanical layers (free items; w line width, h text height)
Board:
  the board outline again, w0.254